# Altium PCB Microcontroller PCB.PcbDoc (part 2 of 2)
Units mm, origin at the board's own origin, x right, y up, seen from the top; angles counter-clockwise.
Board outline 155 x 69 mm, 2 copper layers (Top Layer, Bottom Layer), stack 1.6 mm thick; 87 components, 109 nets, 469 pads, 119 vias.
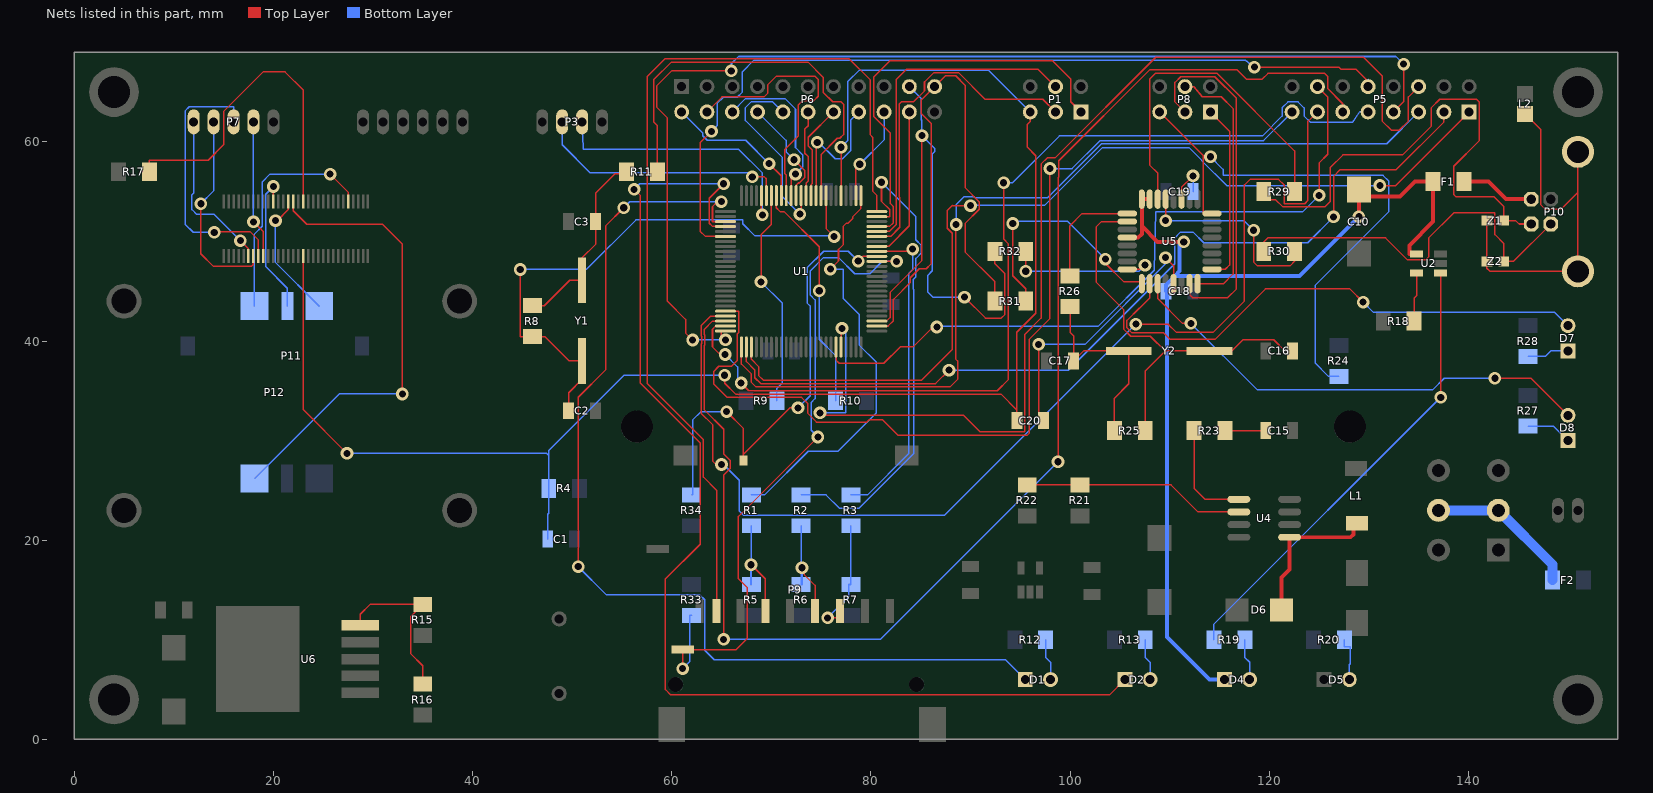
[diagram p2: the nets of this part, all layers, seen from the top]

## Via types
v1: diameter 1.27, hole 0.711, Top Layer to Bottom Layer, 119 vias

## Nets (pads, with @x,y where several pads share a name; then routed paths per layer and width w, separated by ;. In a path a pad name is that pad's centre, name@x,y a point inside that pad or via, vN(x,y) a via of type N, cw(c..) or ccw(c..) an arc to the next point about the centre after c; other vN are vias at no path point) (continued)
LCD_RX: P3.3 U1.46 | length 27.9
  Top Layer w0.152: U1.46@69,54.6 69,52.77 v1(69.101,52.668)
  Bottom Layer w0.152: P3.3@51,62 51.127,59.247 66.714,59.247 69.101,56.859 v1(69.101,52.668)
LCD_TX: P3.2 U1.45 | length 25.9
  Top Layer w0.152: v1(68.085,56.478) 69.304,56.478 69.5,56.283 U1.45@69.5,54.6
  Bottom Layer w0.152: P3.2@49,62 49,59.704 51.819,56.885 67.679,56.885 v1(68.085,56.478)
LED_CONTROL: P5.13 U1.56 | length 86.8
  Top Layer w0.152: v1(63.996,61.05) 62.874,59.929 62.874,51.004 63.378,50.5 U1.56@65.4,50.5 ; v1(118.5,67.5) 127,67.5 127.2,67.3 128.7,67.3 129.92,66.08 P5.13@129.92,65.54
  Bottom Layer w0.152: v1(63.996,61.05) 64.555,61.609 64.555,63.844 65.19,64.479 66.574,64.479 67.097,65.002 67.097,67.047 68.263,68.213 117.6,68.213 117.6,68.2 v1(118.5,67.5) ; P5.13@129.92,65.54 P5.13@129.92,66.28
NetC2_2: C2.2 R8.2 U1.33 Y1.2 | length 58.5
  Top Layer w0.152: v1(44.793,47.182) 44.793,40.45 R8.2@46,40.45 47.257,40.45 49.707,38 Y1.2@51,38 51,36.162 49.65,34.812 C2.2@49.65,33 ; U1.33@75.5,54.6 75.5,51.299 v1(76.313,50.486)
  Bottom Layer w0.152: v1(44.793,47.182) 51.427,47.182 56.405,52.16 67.138,52.16 67.138,51.782 68.367,50.553 76.246,50.553 v1(76.313,50.486)
NetC3_1: C3.1 R8.1 R11.2 Y1.1 | length 19.5
  Top Layer w0.152: R8.1@46,43.55 47.206,43.55 49.756,46.1 Y1.1@51,46.1 51,48.35 52.35,49.7 C3.1@52.35,52 52.35,54.827 54.331,56.809 55.45,56.809 R11.2@55.45,57
NetC15_2: C15.2 R23.1 | length 4.1
  Top Layer w0.152: R23.1@115.55,31 C15.2@119.65,31
NetC16_2: C16.2 R25.2 U5.2 Y2.2 | length 46.8
  Top Layer w0.152: U5.2@105.75,52 103.161,52 102.653,51.492 102.653,45.885 105.377,43.161 105.377,41.193 106.093,40.477 108.061,40.477 109.551,38.987 ; R25.2@107.55,31 107.55,36.987 109.551,38.987 ; C16.2@122.35,39 121.581,39 120.46,40.121 117.364,40.121 116.244,39 Y2.2@114,39 ; 109.551,38.987 Y2.2@114,39 ; 109.551,38.987 109.563,39 Y2.2@114,39
NetC17_1: C17.1 R25.1 R26.2 Y2.1 | length 20.2
  Top Layer w0.152: R26.2@100,43.45 100,40.877 100.35,40.527 C17.1@100.35,38 101.35,39 Y2.1@105.9,39 105.9,35.703 104.45,34.253 R25.1@104.45,31
NetC19_2: C19.2 U5.27 | length 4.4
  Top Layer w0.152: U5.27@111.2,54.25 111.2,55.43 v1(112.35,56.58)
  Bottom Layer w0.152: C19.2@112.35,55 v1(112.35,56.58)
NetD1_2: D1.2 R12.2 | length 4.2
  Bottom Layer w0.152: R12.2@97.55,10 97.55,8.226 98.04,7.736 D1.2@98.04,6
NetD2_2: D2.2 R13.2 | length 4.2
  Bottom Layer w0.152: R13.2@107.55,10 107.55,8.226 108.04,7.736 D2.2@108.04,6
NetD4_2: D4.2 R19.1 | length 4.2
  Bottom Layer w0.152: R19.1@117.55,10 117.55,8.226 118.04,7.736 D4.2@118.04,6
NetD5_2: D5.2 R20.2 | length 4.6
  Bottom Layer w0.152: R20.2@127.55,10 127.55,9.283 128.133,9.283 128.133,7.594 128.04,7.501 D5.2@128.04,6
NetD6_1: D6.1 L1.2 U4.5 | length 15.6
  Top Layer w0.152: L1.2@128.461,21.7 L1.2@128.8,21.7
  Top Layer w0.4: D6.1@121.25,13 121.25,16.245 122.05,17.045 U4.5@122.05,20.295 128.182,20.295 128.461,20.574 L1.2@128.461,21.7
NetD7_1: D7.1 R28.1 | length 4.2
  Bottom Layer w0.152: R28.1@146,38.45 147.714,38.45 148.264,39 D7.1@150,39
NetD7_2: D7.2 U5.10 | length 53.8
  Top Layer w0.152: U5.10@108,45.75 108,44.331 106.969,43.3 106.94,43.3 105.709,42.069 105.709,41.331 106.231,40.809 109.405,40.809 110.017,40.197 114.593,40.197 119.622,45.226 128.105,45.226 v1(129.432,43.9)
  Bottom Layer w0.152: v1(129.432,43.9) 130.468,42.864 148.676,42.864 D7.2@150,41.54
NetD8_1: D8.1 R27.1 | length 4.6
  Bottom Layer w0.152: R27.1@146,31.45 148.55,31.45 D8.1@150,30
NetD8_2: D8.2 U5.11 | length 48.5
  Top Layer w0.152: U5.11@108.8,45.75 108.8,44.261 111.289,41.772 v1(112.129,41.772) ; v1(142.66,36.26) 146.28,36.26 D8.2@150,32.54
  Bottom Layer w0.152: v1(112.129,41.772) 118.784,35.117 136.437,35.117 137.58,36.26 v1(142.66,36.26)
NetF2_2: F2.2 pad.D | length 15.3
  Bottom Layer w1: pad.D@137,23 pad.D@143,23 148.45,17.55 F2.2@148.45,16
NetL2_1: L2.1 P10.S1 P10.S2 Z1.2 Z2.2 | length 40.4
  Top Layer w0.152: Z1.2@141.85,52.1 Z2.2@141.85,48 141.85,47.309 142.159,47 P10.S1@151,47 151,54.938 ; L2.1@145.7,62.8 147.282,61.218 147.282,53.659 147.689,53.253 149.314,53.253 151,54.938 ; P10.S2@151,59 151,54.938
NetP1_1: P1.1 U1.22 | length 42.2
  Top Layer w0.152: U1.22@80.6,51.5 81.877,51.5 82.238,51.861 82.238,53.517 81.956,53.8 81.956,60.865 80.303,62.518 80.303,66.537 81.887,68.121 98.251,68.121 100.064,66.308 100.064,64.016 P1.1@101.08,63
NetP1_3: P1.3 U1.20 | length 34.3
  Top Layer w0.152: U1.20@80.6,50.5 81.989,50.5 82.902,51.413 82.902,54.402 82.854,54.45 82.854,63.805 83.071,64.022 84.29,64.022 85.383,65.114 85.383,66.013 86.329,66.959 88.784,66.959 91.466,64.276 97.264,64.276 P1.3@98.54,63
NetP1_4: P1.4 U1.21 | length 34
  Top Layer w0.152: U1.21@80.6,51 81.852,51 82.57,51.718 82.57,54.022 82.522,54.07 82.522,66.242 83.571,67.291 96.789,67.291 P1.4@98.54,65.54
NetP7_1: P7.1 P11.12 | length 16.9
  Top Layer w0.152: v1(16.687,50.078) 17.5,49.265 P11.12@17.5,48.539
  Bottom Layer w0.152: P7.1@12,62 12,54.874 11.815,54.689 11.815,53.202 12.279,52.738 14.027,52.738 v1(16.687,50.078)
NetP7_2: P7.2 P11.14 | length 20.5
  Top Layer w0.152: v1(12.713,53.786) 12.713,48.757 13.98,47.49 17.775,47.49 18,47.715 P11.14@18,48.539
  Bottom Layer w0.152: v1(12.713,53.786) 14,55.073 P7.2@14,62
NetP7_3: P7.3 P11.16 | length 27.6
  Top Layer w0.152: v1(14.059,50.916) 14.136,50.992 17.641,50.992 18.5,50.133 P11.16@18.5,48.539
  Bottom Layer w0.152: v1(14.059,50.916) 11.951,50.916 11.138,51.729 11.138,63.108 11.545,63.514 16,63.514 P7.3@16,62
NetP7_4: P7.4 P11.18 | length 13.9
  Top Layer w0.152: v1(18,51.969) 19,50.969 P11.18@19,48.539
  Bottom Layer w0.152: v1(18,51.969) P7.4@18,62
NetP8_1: P8.1 U5.17 | length 18.1
  Top Layer w0.152: P8.1@114.08,63 116.015,61.065 116.015,47.632 115.583,47.2 U5.17@114.25,47.2
NetP8_3: P8.3 U5.15 | length 36.1
  Top Layer w0.152: P8.3@111.54,63 110.529,64.011 110.529,65.962 111.113,66.546 114.533,66.546 116.703,64.376 116.703,45.228 115.814,44.339 112.328,44.339 112,44.667 U5.15@112,45.75
NetP8_4: P8.4 U5.16 | length 26.4
  Top Layer w0.152: P8.4@111.54,65.54 112.408,65.54 113.272,64.53 115.177,64.53 116.371,63.336 116.371,46.725 115.38,45.734 112.8,45.734 U5.16@112.8,45.75
NetP8_5: P8.5 R24.1 U5.24 | length 57.2
  Top Layer w0.152: P8.5@109,63 113.373,58.627 ; v1(114.1,58.5) 113.973,58.627 113.373,58.627 ; U5.24@114.25,52.8 113.373,52.8 113.373,58.627
  Bottom Layer w0.152: v1(114.1,58.5) 115.369,57.231 115.369,56.631 131.433,56.631 132.017,56.047 132.017,52.999 124.6,45.582 124.6,37.808 125.958,36.45 R24.1@127,36.45
NetP9_2: P9.2 R3.1 R7.2 | length 12.3
  Top Layer w0.152: v1(75.654,12.206) 76.9,12.206 P9.2@76.9,12.9
  Bottom Layer w0.152: v1(75.654,12.206) 77.788,14.34 77.788,15.55 R7.2@78,15.55 R3.1@78,21.45
NetP9_3: P9.3 R2.1 R6.2 | length 12.7
  Top Layer w0.152: v1(73.089,17.235) 73.292,17.235 73.292,16.565 74.4,15.457 P9.3@74.4,12.9
  Bottom Layer w0.152: R2.1@73,21.45 R6.2@73,15.55 73.089,15.55 v1(73.089,17.235)
NetP9_5: P9.5 R1.1 R5.2 | length 13.2
  Top Layer w0.152: v1(67.958,17.534) 67.984,17.534 69.4,16.118 P9.5@69.4,12.9
  Bottom Layer w0.152: v1(67.958,17.534) 67.958,15.55 R5.2@68,15.55 R1.1@68,21.45
NetP10_2: P10.2 R29.1 Z1.1 | length 50.6
  Top Layer w0.152: R29.1@119.45,55 119.45,54.192 120.638,54.192 121.368,53.462 125.57,53.462 126.122,54.015 126.122,57.416 127.394,58.688 133.389,58.688 136.284,61.584 136.284,63.438 137.122,64.276 140.805,64.276 141.11,63.971 141.11,60.136 138.519,57.545 138.519,54.7 138.748,54.472 142.585,54.472 143.55,53.507 Z1.1@143.55,52.1 144.742,52.1 145.092,51.75 P10.2@146.29,51.75
NetP10_3: P10.3 R30.1 Z2.1 | length 39.8
  Top Layer w0.152: R30.1@119.45,49 119.45,49.951 119.856,50.357 131.684,50.357 133.897,48.144 135.7,48.144 136.005,48.449 136.005,50.332 138.545,52.872 142.66,52.872 142.66,50.689 143.55,49.798 Z2.1@143.55,48 144.54,48 P10.3@148.29,51.75
NetP11_21: P11.21 P12.2 | length 14.7
  Top Layer w0.152: P11.21@20,54 v1(20,55.513)
  Bottom Layer w0.152: v1(20,55.513) 19.223,54.736 19.223,47.479 21.4,45.302 P12.2@21.4,43.5
NetP11_27: P11.27 P12.3 | length 13
  Top Layer w0.152: v1(20.206,52.084) 20.382,52.084 21.5,53.202 P11.27@21.5,54
  Bottom Layer w0.152: v1(20.206,52.084) 20.206,47.894 P12.3@24.6,43.5
NetP11_29: P11.29 P12.4 | length 46.7
  Top Layer w0.152: P11.29@22,54 22,53.084 23.356,51.729 30.95,51.729 32.957,49.722 v1(32.957,34.685)
  Bottom Layer w0.152: P12.4@18.12,26.2 26.605,34.685 v1(32.957,34.685)
NetP11_33: P11.33 R17.2 | length 34.2
  Top Layer w0.152: R17.2@7.55,57 7.55,58.155 13.45,58.155 14.999,59.704 14.999,63.057 18.962,67.019 21.181,67.019 23,65.2 P11.33@23,54
NetP11_51: P11.51 P12.1 | length 23.4
  Top Layer w0.152: v1(25.697,56.758) 27.5,54.954 P11.51@27.5,54
  Bottom Layer w0.152: P12.1@18.1,43.5 18.1,50.74 18.891,51.531 18.891,55.976 19.673,56.758 v1(25.697,56.758)
NetR9_1: R9.1 U1.44 | length 22.1
  Top Layer w0.152: v1(68.97,45.937) 68.97,50.664 70,51.693 U1.44@70,54.6
  Bottom Layer w0.152: v1(68.97,45.937) 71.11,43.797 71.11,35.801 70.55,35.241 R9.1@70.55,34
NetR10_1: R10.1 U1.43 | length 23.3
  Top Layer w0.152: U1.43@70.5,54.6 70.5,53.38 70.879,53.001 71.286,53.001 74.816,49.47 v1(74.816,45.048)
  Bottom Layer w0.152: v1(74.816,45.048) 74.816,40.182 76.45,38.548 R10.1@76.45,34
NetR11_1: R11.1 U1.34 | length 42.1
  Top Layer w0.152: R11.1@58.55,57 58.55,61.634 58.177,62.006 58.177,66.226 59.963,68.012 73.671,68.012 75.223,66.461 75.223,64.962 76.162,64.022 77.001,64.022 77.255,63.768 77.255,60.729 76.875,60.35 76.631,60.35 74.992,58.711 74.992,55.774 75,55.766 U1.34@75,54.6
NetR15_1: R15.1 R16.2 U6.5 | length 16.8
  Top Layer w0.152: U6.5@28.716,11.466 28.715,12.562 29.703,13.55 R15.1@35,13.55 33.77,12.32 33.77,8.61 35,7.38 R16.2@35,5.55
NetR18_2: R18.2 U2.5 | length 5
  Top Layer w0.152: R18.2@134.55,42 134.55,44.286 134.8,44.536 U2.5@134.8,46.85
NetR19_2: R19.2 U2.1 | length 46.3
  Top Layer w0.152: U2.1@137.2,46.85 137.224,46.85 v1(137.224,34.345)
  Bottom Layer w0.152: R19.2@114.45,10 114.45,11.571 v1(137.224,34.345)
NetR21_1: R21.1 R22.2 U4.2 | length 22.4
  Top Layer w0.152: R22.2@95.7,25.55 R21.1@101,25.55 110.139,25.55 112.854,22.835 U4.2@116.95,22.835
NetR23_2: R23.2 U4.1 | length 10.7
  Top Layer w0.152: R23.2@112.45,31 112.45,25.206 113.551,24.105 U4.1@116.95,24.105
NetR26_1: R26.1 U5.1 | length 11.3
  Top Layer w0.152: R26.1@100,46.55 99.988,46.55 99.988,51.576 101.211,52.8 U5.1@105.75,52.8
NetR29_2: R29.2 U5.30 | length 34.5
  Top Layer w0.152: U5.30@108.8,54.25 108.8,56.859 107.989,57.671 107.989,66.283 108.584,66.878 114.759,66.878 122.55,59.087 R29.2@122.55,55
NetR30_2: R30.2 U5.29 | length 20
  Top Layer w0.152: v1(109.6,52.084) U5.29@109.6,54.25 ; v1(118.428,51.119) 118.428,47.944 118.834,47.538 122.086,47.538 122.55,48.002 R30.2@122.55,49
  Bottom Layer w0.152: v1(109.6,52.084) 117.463,52.084 v1(118.428,51.119)
NetR31_2: R31.2 U5.9 | length 24.5
  Top Layer w0.152: v1(94.247,51.796) 94.247,46.554 95.55,45.252 R31.2@95.55,44 ; v1(103.544,48.223) 103.544,47.817 105.423,45.937 107.2,45.937 U5.9@107.2,45.75
  Bottom Layer w0.152: v1(94.247,51.796) 94.247,52.036 99.731,52.036 v1(103.544,48.223)
NetR32_2: R32.2 U5.8 | length 16.2
  Top Layer w0.152: v1(95.55,47.002) R32.2@95.55,49 ; U5.8@105.75,47.2 107.118,47.2 v1(107.531,47.614)
  Bottom Layer w0.152: v1(95.55,47.002) 106.92,47.002 v1(107.531,47.614)
PH6: P6.20 U1.18 | length 15.5
  Top Layer w0.152: U1.18@80.6,49.5 81.784,49.5 83.86,51.576 P6.20@83.86,63
PH7: P6.18 U1.27 | length 9.6
  Top Layer w0.152: U1.27@78.5,54.6 78.5,57.368 v1(78.88,57.748)
  Bottom Layer w0.152: v1(78.88,57.748) 81.32,60.188 P6.18@81.32,63
PHOTOAMP_OUTPUT: P5.15 U1.95 | length 72.5
  Top Layer w0.152: U1.95@76.5,39.4 76.5,38.089 76.832,37.757 81.291,37.757 82.944,39.41 84.231,39.41 86.475,41.653 86.475,41.467 86.542,41.4 v1(86.621,41.4) ; P5.15@124.84,65.54 125.87,64.51 125.87,58.743 125.007,57.88 v1(125.007,54.624)
  Bottom Layer w0.152: v1(86.621,41.4) 86.542,41.4 86.475,41.467 102.807,41.467 108.446,47.106 108.624,52.999 123.381,52.999 v1(125.007,54.624)
PL0: P6.16 U1.35 | length 14
  Top Layer w0.152: U1.35@74.5,54.6 74.5,59.834 v1(74.613,59.947)
  Bottom Layer w0.152: v1(74.613,59.947) 74.769,59.947 76.411,58.305 77.138,58.305 77.989,59.156 77.989,62.209 P6.16@78.78,63
PL1: P6.14 U1.36 | length 9.7
  Top Layer w0.152: U1.36@74,54.6 74,55.716 74.101,55.817 74.101,59.179 73.7,59.58 73.7,60.46 P6.14@76.24,63
PL2: P6.12 U1.37 | length 8.8
  Top Layer w0.152: U1.37@73.5,54.6 73.5,55.871 73.7,56.071 73.7,58.515 73.368,58.847 73.368,61.293 73.7,61.625 P6.12@73.7,63
PL3: P6.10 U1.38 | length 19.3
  Top Layer w0.152: v1(72.86,52.745) 73,52.884 U1.38@73,54.6
  Bottom Layer w0.152: P6.10@71.16,63 70.154,64.006 67.967,64.006 67.399,63.438 67.399,62.143 71.078,58.464 71.078,54.527 v1(72.86,52.745)
PL4: P6.8 U1.39 | length 10.8
  Top Layer w0.152: v1(72.276,58.206) 73.343,57.139 73.343,56.4 72.81,55.867 72.708,55.867 72.5,55.659 U1.39@72.5,54.6
  Bottom Layer w0.152: P6.8@68.62,63 71.484,60.136 71.484,58.998 v1(72.276,58.206)
PL5: P6.6 U1.40 | length 16.8
  Top Layer w0.152: U1.40@72,54.6 72,56.329 v1(72.429,56.758)
  Bottom Layer w0.152: P6.6@66.08,63 67.418,64.338 71.376,64.338 72.429,63.286 72.429,59.431 73.167,58.692 73.167,57.496 v1(72.429,56.758)
PL6: P6.4 U1.41 | length 27
  Top Layer w0.152: P6.4@63.54,63 65.045,64.505 69.254,64.505 69.66,64.911 69.66,65.749 70.473,66.562 74.41,66.562 74.715,66.257 74.715,64.581 74.283,64.149 73.165,64.149 72.683,63.667 72.683,60.568 71.362,59.247 71.362,56.809 71.5,56.67 U1.41@71.5,54.6
PL7: P6.2 U1.42 | length 14.8
  Top Layer w0.152: v1(69.781,57.805) 71,56.586 U1.42@71,54.6
  Bottom Layer w0.152: P6.2@61,63 63.105,60.895 63.105,60.619 63.564,60.159 67.427,60.159 v1(69.781,57.805)
PT_A0: P5.4 U1.75 | length 114.1
  Top Layer w0.152: v1(62.1,40.1) 61.391,40.809 61.391,42.174 59.565,44 59.565,62.397 58.509,63.452 58.509,65.648 59.983,67.121 v1(65.977,67.121) ; v1(65.393,40.121) 64.986,40.527 64.986,41 U1.75@65.4,41 ; P5.4@132.46,63 133.49,64.03 v1(133.49,67.807)
  Bottom Layer w0.152: v1@61.979,40.121 v1(65.393,40.121) ; v1(65.977,67.121) 65.977,67.832 66.714,68.569 132.728,68.569 v1(133.49,67.807)
PT_A1: P5.5 U1.74 | length 98.2
  Top Layer w0.152: v1(65.367,38.648) 64.856,38.648 64.094,39.41 64.094,41.192 64.402,41.5 U1.74@65.4,41.5 ; v1(66.968,35.777) 67.73,35.015 92.698,35.015 93.815,36.133 93.815,49.747 93.333,50.23 v1(93.333,55.894)
  Bottom Layer w0.152: v1(65.367,38.648) 66.612,37.403 66.612,36.133 v1(66.968,35.777) ; v1(93.333,55.894) 94.222,55.894 98.928,60.6 119.311,60.6 121.294,62.583 121.294,63.417 121.883,64.006 122.894,64.006 123.5,63.4 123.5,62.608 124.118,61.99 128.385,61.99 129.071,63 P5.5@129.92,63
PT_A2: P5.6 U1.73 | length 141.9
  Top Layer w0.152: v1(65.215,10.047) 65.215,26.555 65.891,27.231 65.891,27.969 65.215,28.645 65.215,31.149 63.281,33.083 63.281,39.551 63.323,39.593 63.323,40.607 63.281,40.649 63.281,41.184 64.097,42 U1.73@65.4,42 ; v1(98.794,27.878) 98.794,56.426 98.872,56.504 98.872,58.106 107.989,67.223 116.777,67.223 117.691,66.309 119.309,66.309 119.868,66.868 125.564,66.868 125.87,66.562 125.87,65.343 127.38,63.833 P5.6@127.38,63
  Bottom Layer w0.152: v1(65.215,10.047) 80.963,10.047 v1(98.794,27.878)
PT_A3: P5.7 U1.72 | length 115.3
  Top Layer w0.152: v1(65,27.6) 64.44,27.6 64.097,27.943 64.097,31.602 62.949,32.751 62.949,39.689 62.991,39.731 62.991,40.469 62.949,40.511 62.949,41.538 63.911,42.5 U1.72@65.4,42.5 ; v1(106.6,41.7) 109.9,41.7 109.869,41.669 110.681,40.857 114.364,40.857 117.514,44.007 117.514,55.666 118.072,56.224 120.943,56.224 121.527,55.64 121.527,53.794 123.559,53.794 123.889,54.124 123.889,62.049 P5.7@124.84,63
  Bottom Layer w0.152: v1(65,27.6) 64.454,27.6 64.827,27.973 66.79,26.01 66.79,22.925 67.222,22.493 87.393,22.493 v1(106.6,41.7)
PT_A4: P5.8 U1.71 | length 99.2
  Top Layer w0.152: U1.71@65.4,43 66.714,43 66.714,40.832 66.587,40.705 66.587,38.036 66.007,37.456 64.731,37.456 64.221,36.946 64.221,35.674 65.566,34.33 73.038,34.33 73.673,33.695 73.673,32.729 74.537,31.866 79.591,31.866 79.82,32.094 81.166,32.094 82.741,30.52 95.67,30.52 95.924,30.774 95.924,40.197 97.981,42.254 v1(97.981,57.317)
  Bottom Layer w0.152: v1(97.981,57.317) 100.207,57.317 103.022,60.132 119.432,60.132 P5.8@122.3,63
PT_CS1: P5.1 U1.78 | length 98
  Top Layer w0.152: U1.78@68,39.4 68,38.164 68.725,37.439 68.725,36.534 69.206,36.054 85.084,36.054 88.177,39.146 88.177,50.822 87.667,51.332 87.667,53.098 88.177,53.608 88.185,53.6 v1(90,53.6) ; v1(131.103,55.615) 132.695,55.615 P5.1@140.08,63
  Bottom Layer w0.152: v1(90,53.6) 90.008,53.608 97.437,53.608 103.254,59.425 111.951,59.425 113.209,58.167 113.209,58.131 115.725,55.615 v1(131.103,55.615)
PT_CS2: P5.2 U1.77 | length 89.5
  Top Layer w0.152: U1.77@67.5,39.4 67.5,37.942 68.342,37.1 68.342,36.321 68.942,35.722 86.495,35.722 v1(87.846,37.073) ; v1(126.454,52.465) 126.454,56.529 127.115,57.19 132.739,57.19 137.54,61.99 P5.2@137.54,63
  Bottom Layer w0.152: v1(87.846,37.073) 99.81,37.073 110.503,47.766 110.503,50.357 111.087,50.941 112.357,50.941 113.424,49.874 123.864,49.874 v1(126.454,52.465)
PT_CS3: P5.3 U1.76 | length 93.2
  Top Layer w0.152: U1.76@67,39.4 67,37.691 68.005,36.687 68.005,35.84 68.455,35.389 87.956,35.389 88.742,36.175 88.742,37.957 88.509,38.191 88.509,51.655 v1(88.558,51.703)
  Bottom Layer w0.152: v1(88.558,51.703) 88.558,53.688 89.36,54.491 90.369,54.491 90.46,54.4 97.759,54.4 103.159,59.8 131.8,59.8 P5.3@135,63
RESET: C1.2 C20.2 P1.5 P11.34 R4.1 U1.30 | length 167.5
  Top Layer w0.152: P11.34@23,48.539 23,33.111 v1(27.394,28.716) ; v1(65.317,36.565) 65.317,35.765 66.409,34.672 93.063,34.672 94.65,33.085 ; U1.30@77,54.6 v1(77,59.459) ; C20.2@94.65,32 94.65,33.085 ; P1.5@96,63 96,62.043 95.718,61.761 95.718,59.448 96.559,58.608 96.559,42.788 94.65,40.879 94.65,33.085
  Bottom Layer w0.152: v1(27.394,28.716) 47.447,28.716 47.65,28.513 ; C1.2@47.55,20.1 47.55,22.595 47.65,22.695 R4.1@47.65,25.2 47.65,28.513 ; v1(65.317,36.565) 55.207,36.565 47.65,29.007 47.65,28.513 ; v1(77,59.459) 77.657,60.116 77.657,66.025 78.842,67.21 91.79,67.21 P1.5@96,63
RXD0: P6.21 R31.1 U1.2 | length 56.3
  Top Layer w0.152: U1.2@80.6,41.5 81.725,41.5 82.26,42.036 82.26,44.178 83.945,45.862 83.945,46.344 84.856,47.255 85.556,47.255 86.043,47.742 86.043,61.863 85.052,62.854 85.052,64.192 P6.21@86.4,65.54 87.487,66.627 88.52,66.627 89.459,65.689 89.459,55.401 90.891,53.969 90.891,53.231 89.459,51.799 89.459,48.948 92.45,45.957 R31.1@92.45,44
SD_CD: P9.CD R34.1 U1.16 | length 47.4
  Top Layer w0.152: v1(65.52,32.907) 67.2,31.227 67.2,28.618 ; P9.CD@67.2,28 67.2,28.618 ; v1(72.683,33.288) 71.87,33.288 67.2,28.618 ; v1(78.728,48.02) 79.208,48.5 U1.16@80.6,48.5
  Bottom Layer w0.152: R34.1@62,24.55 62.091,24.55 62.091,32.069 62.929,32.907 v1(65.52,32.907) ; v1(72.683,33.288) 73.902,34.507 73.902,43.517 73.593,43.825 73.593,47.356 75.261,49.024 77.724,49.024 v1(78.728,48.02)
SD_CS: R3.2 U1.17 | length 32
  Top Layer w0.152: U1.17@80.6,49 84.189,49 v1(84.189,49.223)
  Bottom Layer w0.152: R3.2@77.991,24.55 79.65,24.55 83.782,28.682 83.782,46.748 84.189,47.154 v1(84.189,49.223)
SD_MISO: P9.7 U1.25 | length 94.1
  Top Layer w0.152: P9.7@64.5,12.9 64.5,25.022 63.188,26.334 63.188,30.088 57.519,35.757 57.519,66.539 59.324,68.344 77.81,68.344 79.947,66.207 79.947,60.695 80.172,60.47 80.172,55.054 80.607,54.618 80.607,53 U1.25@80.6,53
SD_MOSI: R2.2 U1.24 | length 48.5
  Top Layer w0.152: U1.24@80.6,52.5 81.906,52.5 81.906,53.173 81.065,54.015 v1(81.065,55.945)
  Bottom Layer w0.152: R2.2@73,24.55 75.502,24.55 76.844,23.208 78.808,23.208 84.312,28.712 84.312,45.158 84.277,45.193 84.277,46.207 84.521,46.45 84.521,48.295 85.08,48.854 85.08,49.592 84.5,50.172 84.5,52.51 v1(81.065,55.945)
SD_SCK: R1.2 U1.26 | length 41.8
  Top Layer w0.152: v1(75.934,47.224) 76.747,48.036 76.747,49.189 77.204,49.646 77.204,51.504 77.509,51.809 77.669,51.809 78.191,52.331 78.191,52.491 78.962,53.262 78.962,53.306 79,53.344 U1.26@79,54.6
  Bottom Layer w0.152: R1.2@68,24.55 69.312,24.55 73.702,28.941 76.692,28.941 80.557,32.806 80.557,37.86 78.855,39.562 78.855,42.633 77.227,44.261 77.204,47.224 v1(75.934,47.224)
SD_WP: P9.WP R33.1 U1.15 | length 68.3
  Top Layer w0.152: v1(61.1,7.101) P9.WP@61.1,9 66.454,9 67.577,10.123 67.577,15.254 66.7,16.131 66.7,22.389 v1(74.678,30.367) ; U1.15@80.6,48 v1(82.589,48)
  Bottom Layer w0.152: v1(61.1,7.101) 61.811,7.812 61.811,12.45 R33.1@62,12.45 ; v1(74.678,30.367) 74.001,31.044 74.001,33.824 74.397,34.219 74.397,44.122 73.925,44.593 73.925,47.053 75.248,48.376 76.747,48.376 78.372,46.75 79.896,46.75 81.146,48 v1(82.589,48)
STAT_LED1: D1.1 U1.53 | length 104.4
  Top Layer w0.152: v1(50.61,17.337) 50.61,34.355 53.353,37.098 53.353,51.551 v1(55.182,53.38) ; v1(64.986,53.989) 64.58,53.989 64.094,53.503 64.094,52 U1.53@65.4,52
  Bottom Layer w0.152: v1(50.61,17.337) 53.404,14.543 62.777,14.543 63.31,14.01 63.31,8.955 64.275,7.99 93.51,7.99 D1.1@95.5,6 ; v1(55.182,53.38) 55.792,53.989 v1(64.986,53.989)
STAT_LED2: D2.1 U1.54 | length 117
  Top Layer w0.152: v1(56.223,55.234) 56.858,54.599 56.858,35.755 62.856,29.758 62.856,19.601 59.373,16.118 59.373,4.993 59.906,4.459 103.959,4.459 D2.1@105.5,6 ; v1(65.215,55.793) 63.762,54.34 63.762,51.835 64.097,51.5 U1.54@65.4,51.5
  Bottom Layer w0.152: v1(56.223,55.234) 56.782,55.793 v1(65.215,55.793)
THERMISTOR_VOLTAGE: P5.11 U1.96 | length 113.3
  Top Layer w0.152: v1(74.892,32.78) 75.146,32.526 89.32,32.526 90.971,30.875 95.466,30.875 95.466,40.68 97.086,42.299 97.086,57.769 97.702,58.385 98.49,58.385 108.597,68.491 129.479,68.491 131.331,66.638 131.331,62.092 132.246,61.177 133.058,61.177 133.973,62.092 133.973,64.513 P5.11@135,65.54 ; U1.96@77,39.4 77,41.162 v1(77.102,41.264)
  Bottom Layer w0.152: v1(74.892,32.78) 77.458,32.78 77.458,40.908 v1(77.102,41.264)
TXD0: P6.19 R32.1 U1.3 | length 58.8
  Top Layer w0.152: U1.3@80.6,42 81.578,42 81.928,42.35 81.928,44.873 85.129,48.073 v1(85.129,60.619) ; v1(89.4,44.4) 91.5,42.3 93.1,42.3 93.46,42.66 93.46,46.756 92.45,47.766 R32.1@92.45,49
  Bottom Layer w0.152: P6.19@83.86,65.54 85.062,64.338 85.062,62.225 85.129,62.159 v1(85.129,60.619) 86.4,59.347 86.4,59.007 86.168,58.775 86.168,47.052 85.7,46.584 85.7,44.931 86.231,44.4 v1(89.4,44.4)
USB_DTR: C20.1 U5.13 | length 27.6
  Top Layer w0.152: v1(96.838,39.664) 96.838,32.81 97.35,32.298 C20.1@97.35,32 ; v1(109.589,48.376) 110.4,47.565 U5.13@110.4,45.75
  Bottom Layer w0.152: v1(96.838,39.664) 101.496,39.664 109.589,47.756 v1(109.589,48.376)
USB_VCC: F1.1 P10.1 | length 7.5
  Top Layer w0.4: F1.1@139.55,56 142.025,56 143.775,54.25 P10.1@146.29,54.25
USB_VCC_FUSED: C10.1 C18.2 D4.1 F1.2 U2.4 U5.4 U5.31 U5.32 | length 99.6
  Top Layer w0.4: U5.4@105.75,50.4 106.846,50.4 107.2,50.754 107.2,51.529 ; U5.31@108,54.25 U5.32@107.2,54.25 107.2,51.529 ; v1(111.417,49.951) 108.778,49.951 107.2,51.529 ; v1(129,52.49) C10.1@129,54.5 ; C10.1@129,55.2 C10.1@129,54.5 ; U2.4@134.8,48.75 134.074,48.75 134.074,49.607 136.45,51.983 F1.2@136.45,56 134.622,56 133.122,54.5 C10.1@129,54.5
  Bottom Layer w0.4: v1(111.417,49.951) 111.213,49.951 111.01,49.747 111.01,47.01 110.518,46.518 ; D4.1@115.5,6 113.992,6 109.716,10.276 109.716,44.934 C18.2@109.65,45 109.65,45.65 110.518,46.518 ; v1(129,52.49) 123.027,46.518 110.518,46.518
VCC: 
pads on no net: P4.6 P9. P9.1 P9.8 P9.9 P11.2 P11.4 P11.6 P11.8 P11.10 P11.22 P11.23 P11.24 P11.25 P11.26 P11.28 P11.30 P11.31 P11.32 P11.35 P11.36 P11.37 P11.38 P11.39 P11.40 P11.41 P11.42 P11.43 P11.44 P11.45 P11.46 P11.47 P11.48 P11.49 P11.50 P11.52 P11.53 P11.54 P11.55 P11.56 P11.57 P11.58 P11.59 P11.60 P12.5 P12.S1 P12.S2 U1.1 U1.4 U1.5 U1.6 U1.7 U1.8 U1.9 U1.14 U1.19 U1.23 U1.28 U1.29 U1.47 U1.48 U1.49 U1.50 U1.51 U1.52 U1.58 U1.59 U1.60 U1.65 U1.66 U1.67 U1.68 U1.69 U1.70 U1.79 U1.82 U1.83 U1.84 U1.85 U1.86 U1.87 U1.88 U1.89 U3.4 U4.3 U4.8 U5.5 U5.6 U5.7 U5.12 U5.14 U5.18 U5.19 U5.20 U5.21 U5.22 U5.23 U5.25 U5.26

## Polygon pours and split planes (outlines as drawn)
GND on Bottom Layer "Component Outline-No Net" (solid, remove dead copper, pour order 2): 0.5,68.5 154.5,68.5 154.5,0.5 0.5,0.5 0.5,68.5

## Silkscreen, mask and mechanical layers (free items; w line width, h text height)
Top Overlay:
  lines w0.2: 137.5,10 135.3,10 135.3,33.5 144.7,33.5 144.7,10
  lines w0.254: 137.5,10 137.5,9.5 142.5,9.5 142.5,10 144.7,10
  text "MIC/SPK" at 10.5,57.5 h1.52
  text "LCD" at 45,57.5 h1.52
  text "GPS" at 27.2,57.4 h1.52
  text "USB" at 143.1,44.5 h1.52
  text "RX" at 152,39.4 h1.52 r270
  text "SM5100B CELL MODULE" at 7.5,33.5 h1.52
  text "TX" at 152.2,30.7 h1.52 r270
  text "SD SLOT" at 56.2,16.7 h1.52 r90
  text "PWR" at 124.9,2.5 h1.52
  text "STAT2" at 93.3,2.4 h1.52
  text "CHG" at 114.8,2.4 h1.52
  text "STAT1" at 103.6,2.249 h1.52
Bottom Overlay:
  text "ICSP2" at 115.2,59.6 h1.52
  text "EXPANSION" at 87.7,59.5 h1.52
  text "ICSP1" at 102.2,59.5 h1.52
  text "B2B HEADER" at 141.5,59.5 h1.52
  text "SIM" at 28.7,46 h1.52
Board Outline (M1):
  lines w0.152: 0,0 0,69
  lines w0.254: 0,0 154.8,0 ; 0,69 155,69 155,0
Box Outline (M2):
  lines w0.254: -14,-5 -14,82 160,82 160,-5 -14,-5 ; -11,-2 -11,79 157,79 157,-2 -11,-2
Component Outline (M15):
  lines w0.254: 135.3,-7.9 144.7,-7.9 ; 135.3,9.9 135.3,-10.4 144.7,-10.4 144.7,10 ; 94.3,-5.2 94.3,1.8 99.3,1.8 99.3,-5.2 94.3,-5.2 ; 104.3,-5.2 109.3,-5.2 109.3,1.8 104.3,1.8 104.3,-5.2 ; 114.3,-5.2 119.3,-5.2 119.3,1.8 114.3,1.8 114.3,-5.2 ; 124.3,-5.2 129.3,-5.2 129.3,1.8 124.3,1.8 124.3,-5.2

## Text inside footprints (layer, text, board x,y; h text height)
P1: Bottom Overlay "6" at 94,66.1 h1.27; Bottom Overlay "5" at 94.1,61.8 h1.27; Bottom Overlay "1" at 103.4,61.8 h1.27
P5: Bottom Overlay "1" at 142.6,61.8 h1.27; Bottom Overlay "9" at 142.9,65.6 h1.27; Bottom Overlay "8" at 120.267,61.806 h1.27; Bottom Overlay "16" at 120.2,65.5 h1.27
P6: Bottom Overlay "22" at 90.9,61.9 h1.27; Bottom Overlay "21" at 90.9,66 h1.27; Bottom Overlay "2" at 59,61.7 h1.27; Bottom Overlay "1" at 59,66.2 h1.27
P8: Bottom Overlay "6" at 107.2,65.4 h1.27; Bottom Overlay "5" at 107.1,61.9 h1.27; Bottom Overlay "2" at 116.8,65.6 h1.27; Bottom Overlay "1" at 116.5,61.9 h1.27